# EAGLE board Qwiic Distance Sensor - VCNL4040-Panel (EAGLE 7.7.0)
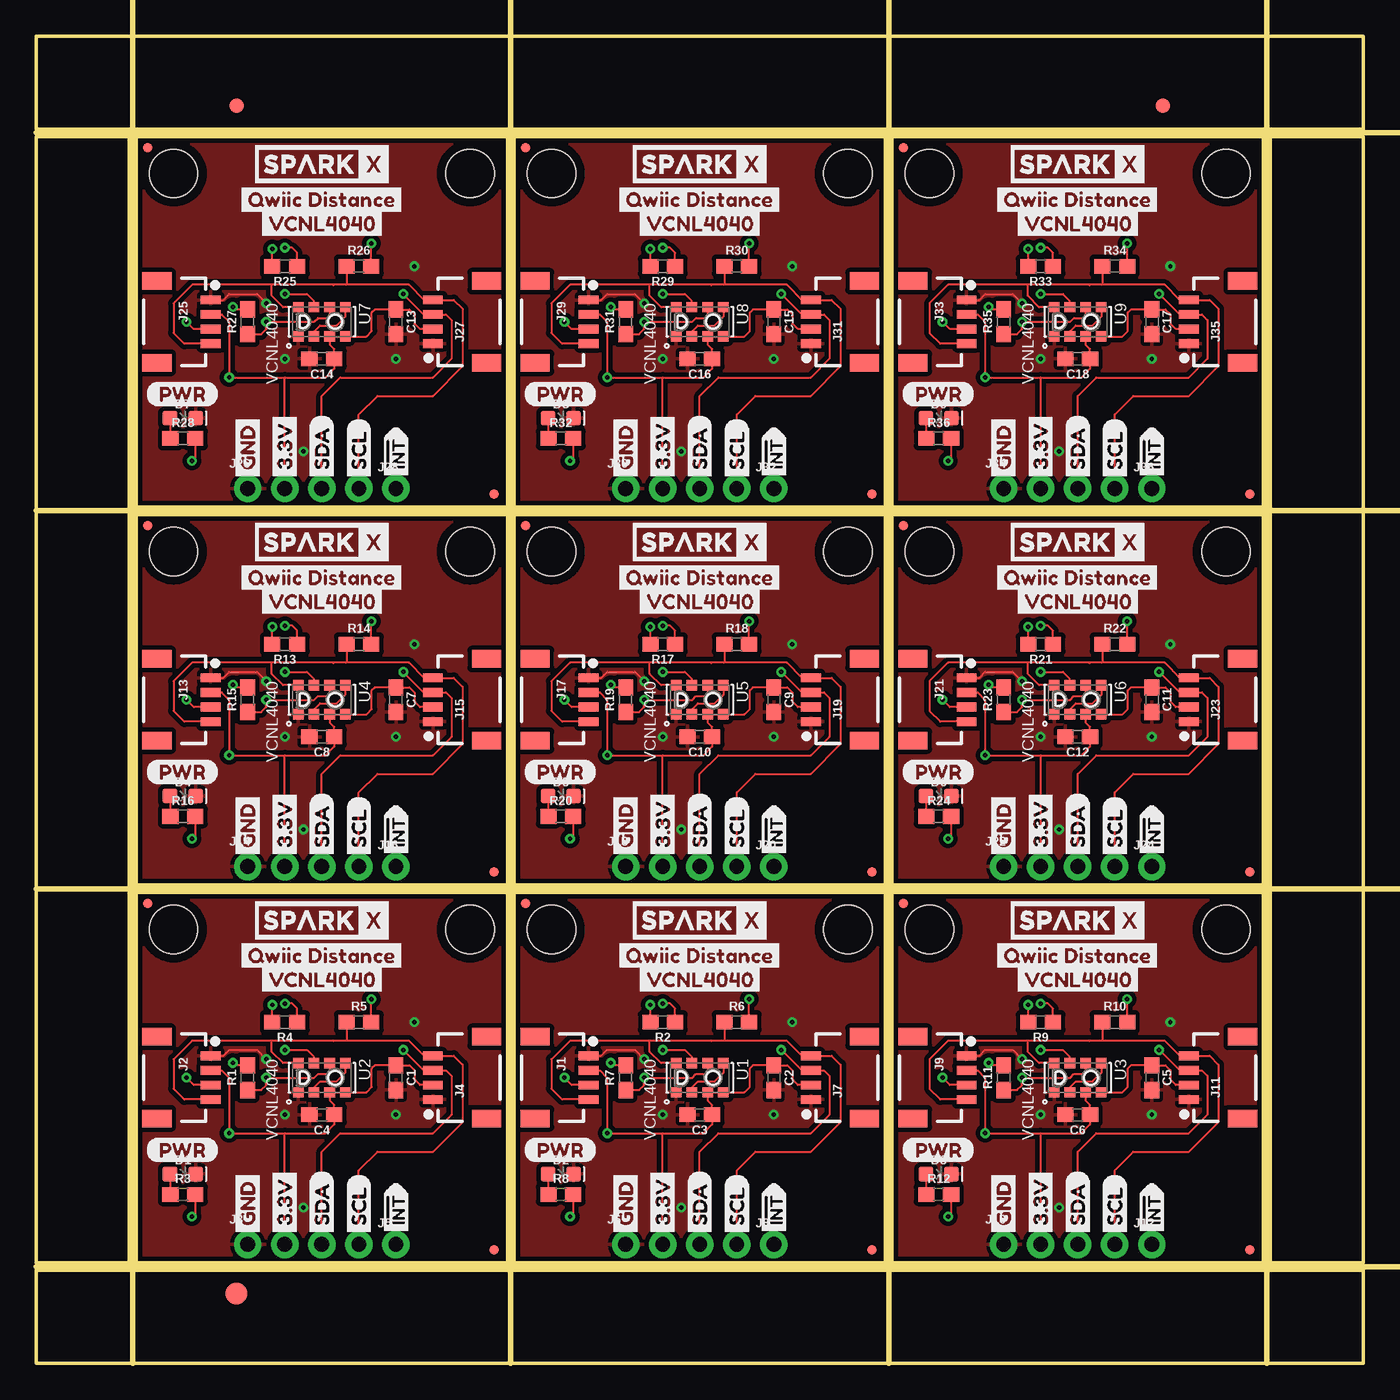
[diagram p0: board, top side]
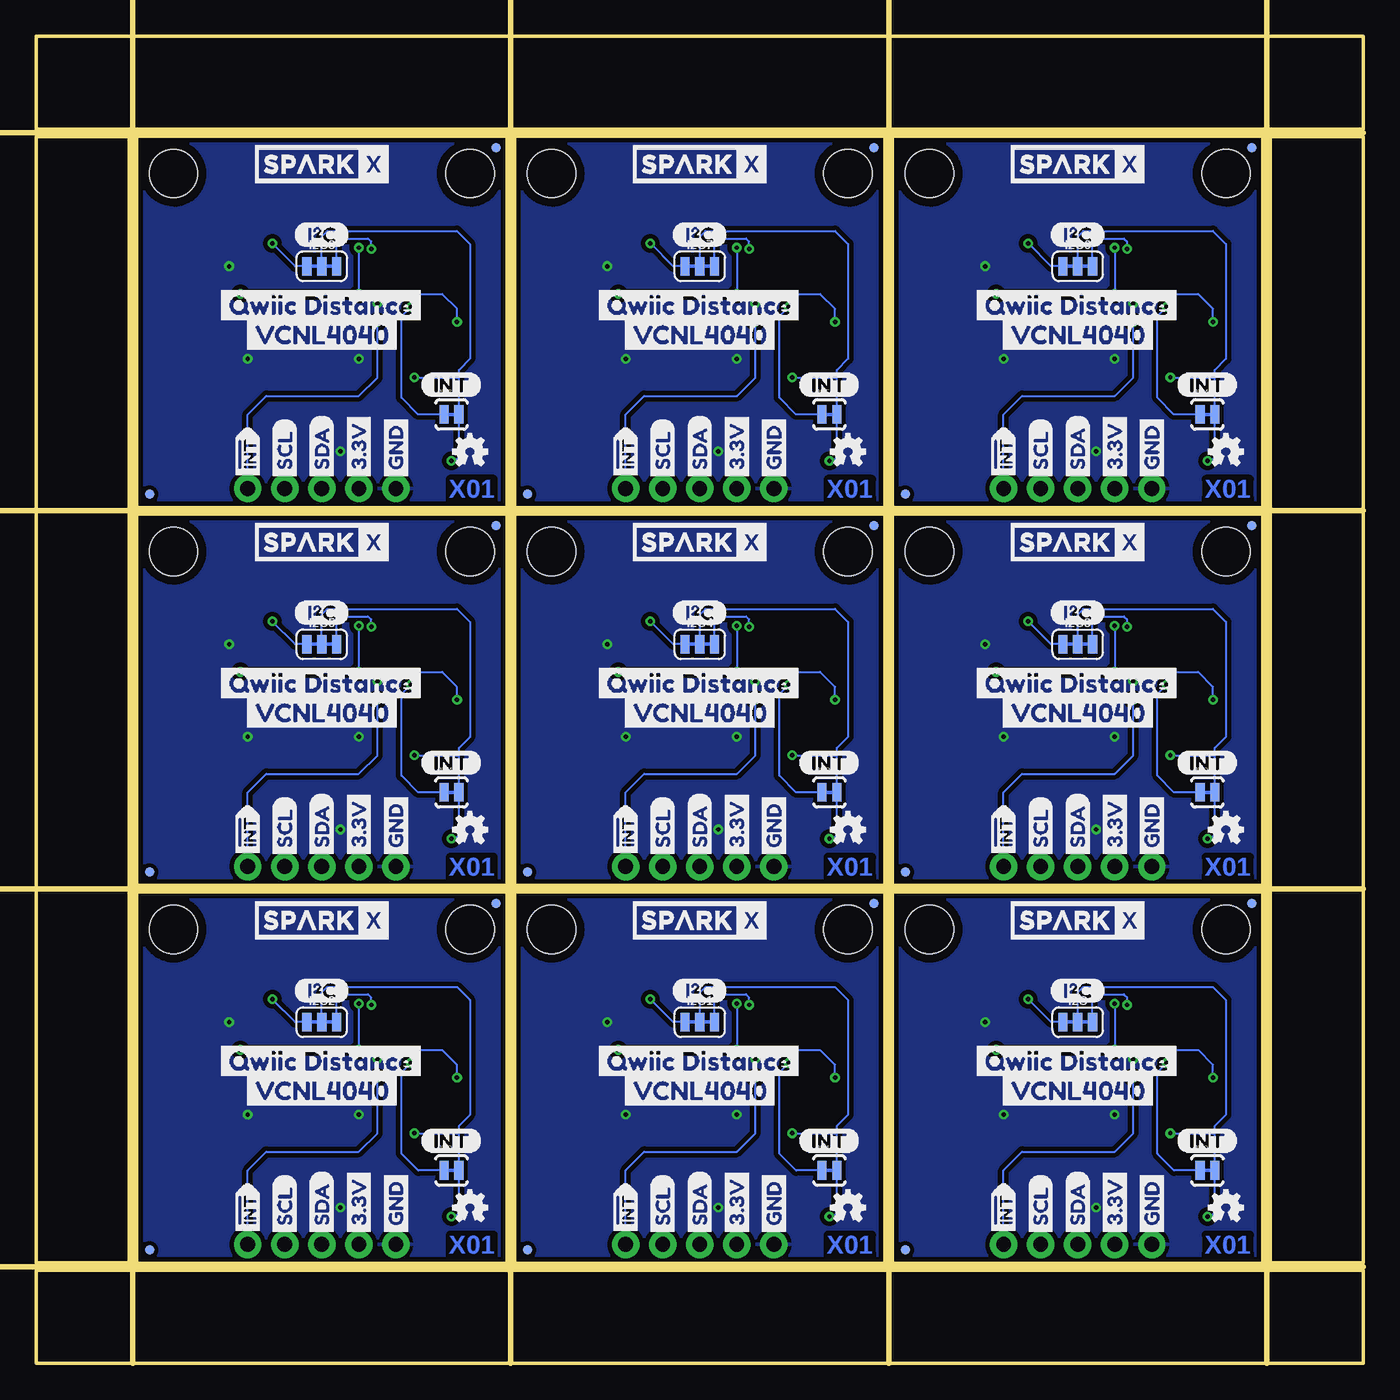
[diagram p1: board, bottom side, seen from below]

Size 90.93 x 90.93 mm. Coordinates in mm from the lower left corner, seen from the top.
Outline: 6.86,6.86 6.86,32.26 32.26,32.26 32.26,6.86 6.86,6.86
Outline: 32.77,6.86 32.77,32.26 58.17,32.26 58.17,6.86 32.77,6.86
Outline: 58.67,6.86 58.67,32.26 84.07,32.26 84.07,6.86 58.67,6.86
Outline: 6.86,32.77 6.86,58.17 32.26,58.17 32.26,32.77 6.86,32.77
Outline: 32.77,32.77 32.77,58.17 58.17,58.17 58.17,32.77 32.77,32.77
Outline: 58.67,32.77 58.67,58.17 84.07,58.17 84.07,32.77 58.67,32.77
Outline: 6.86,58.67 6.86,84.07 32.26,84.07 32.26,58.67 6.86,58.67
Outline: 32.77,58.67 32.77,84.07 58.17,84.07 58.17,58.67 32.77,58.67
Outline: 58.67,58.67 58.67,84.07 84.07,84.07 84.07,58.67 58.67,58.67
Outline: 0,6.35 90.93,6.35 90.93,0 0,0 0,6.35
Outline: 84.58,84.07 90.93,84.07 90.93,6.86 84.58,6.86 84.58,84.07
Outline: 0,90.93 90.93,90.93 90.93,84.58 0,84.58 0,90.93
Outline: 0,84.07 6.35,84.07 6.35,6.86 0,6.86 0,84.07
Copper layers (1*16): Top 0.035mm / dielectric 1.5mm / Bottom 0.035mm
Design rules "SparkFun-2-layer-PCBWay-LIMIT": minimum track width 6mil, minimum drill 0.3mm, track to track 6mil, track to pad 6mil, pad to pad 6mil, via to via 6mil, smd to smd 6mil, copper to edge 6mil, drill to drill 6mil, minimum pad ring 7mil, minimum via ring 7mil, stop-mask expansion 4mil, vias tented up to drill 25mil, thermal gap 10mil
Milling: 8 lines

## Footprints (pad centres in the part's own frame; a part is rotated, then mirrored left to right if it is on the bottom)
0603 = smd 1.1 x 1: 1 -0.85,0; 2 0.85,0
LED-0603 = smd 1 x 1: A -0.877,0; C 0.877,0
FIDUCIAL-1X2 = smd 1 x 1: 1 0,0
FIDUCIAL-1.5X3 = smd 1.5 x 1.5: 1 0,0
SMT-JUMPER_3_2-NC_TRACE_SILK = smd 0.635 x 1.27: 1 -1.016,0; 2 0,0; 3 1.016,0
1X04_1MM_RA = smd 0.6 x 1.35: 1 -1.5,0; 2 -0.5,0; 3 0.5,0; 4 1.5,0 | smd 1.2 x 2: NC1 2.8,-3.675; NC2 -2.8,-3.675
1X04_NO_SILK = drill 1.016 pad 1.88: 1 0,0; 2 2.54,0; 3 5.08,0; 4 7.62,0
1X01_NO_SILK = drill 1.016 pad 1.88: 1 0,0
MICRO-FIDUCIAL = smd 0.635 x 0.635: 1 0,0
STAND-OFF = hole 3.302: 0,0
PAD-JUMPER-2-NC_BY_TRACE_YES_SILK = smd 0.635 x 1.27: 1 -0.508,0; 2 0.508,0
VCNL4040 = smd 0.7 x 0.725: 1 1,-1.613; 2 1,-0.537; 3 1,0.537; 4 1,1.613; 5 -1,1.613; 6 -1,0.537; 7 -1,-0.537; 8 -1,-1.613

## Placement (x,y rotation side)
C1  2.2uF  [0603]  24.64,19.56 270 top
C2  2.2uF  [0603]  50.55,19.56 270 top
C3  0.1uF  [0603]  45.47,17.02 180 top
C4  0.1uF  [0603]  19.56,17.02 180 top
C5  2.2uF  [0603]  76.45,19.56 270 top
C6  0.1uF  [0603]  71.37,17.02 180 top
C7  2.2uF  [0603]  24.64,45.47 270 top
C8  0.1uF  [0603]  19.56,42.93 180 top
C9  2.2uF  [0603]  50.55,45.47 270 top
C10  0.1uF  [0603]  45.47,42.93 180 top
C11  2.2uF  [0603]  76.45,45.47 270 top
C12  0.1uF  [0603]  71.37,42.93 180 top
C13  2.2uF  [0603]  24.64,71.37 270 top
C14  0.1uF  [0603]  19.56,68.83 180 top
C15  2.2uF  [0603]  50.55,71.37 270 top
C16  0.1uF  [0603]  45.47,68.83 180 top
C17  2.2uF  [0603]  76.45,71.37 270 top
C18  0.1uF  [0603]  71.37,68.83 180 top
D1  RED  [LED-0603]  10.03,12.95 0 top
D2  RED  [LED-0603]  35.94,12.95 0 top
D3  RED  [LED-0603]  61.85,12.95 0 top
D4  RED  [LED-0603]  10.03,38.86 0 top
D5  RED  [LED-0603]  35.94,38.86 0 top
D6  RED  [LED-0603]  61.85,38.86 0 top
D7  RED  [LED-0603]  10.03,64.77 0 top
D8  RED  [LED-0603]  35.94,64.77 0 top
D9  RED  [LED-0603]  61.85,64.77 0 top
E$1  [FIDUCIAL-1X2]  13.72,86.17 0 top
E$2  [FIDUCIAL-1X2]  77.22,86.17 0 top
E$3  [FIDUCIAL-1.5X3]  13.72,4.76 0 top
I2C  [SMT-JUMPER_3_2-NC_TRACE_SILK]  19.56,23.37 0 bottom
I2C1  [SMT-JUMPER_3_2-NC_TRACE_SILK]  45.47,23.37 0 bottom
I2C2  [SMT-JUMPER_3_2-NC_TRACE_SILK]  71.37,23.37 0 bottom
I2C3  [SMT-JUMPER_3_2-NC_TRACE_SILK]  19.56,49.28 0 bottom
I2C4  [SMT-JUMPER_3_2-NC_TRACE_SILK]  45.47,49.28 0 bottom
I2C5  [SMT-JUMPER_3_2-NC_TRACE_SILK]  71.37,49.28 0 bottom
I2C6  [SMT-JUMPER_3_2-NC_TRACE_SILK]  19.56,75.18 0 bottom
I2C7  [SMT-JUMPER_3_2-NC_TRACE_SILK]  45.47,75.18 0 bottom
I2C8  [SMT-JUMPER_3_2-NC_TRACE_SILK]  71.37,75.18 0 bottom
J1  SMD  [1X04_1MM_RA]  37.85,19.56 270 top
J2  SMD  [1X04_1MM_RA]  11.94,19.56 270 top
J3  PTH  [1X04_NO_SILK]  14.48,8.13 0 top
J4  SMD  [1X04_1MM_RA]  27.18,19.56 90 top
J5  [1X01_NO_SILK]  24.64,8.13 0 top
J6  PTH  [1X04_NO_SILK]  40.39,8.13 0 top
J7  SMD  [1X04_1MM_RA]  53.09,19.56 90 top
J8  [1X01_NO_SILK]  50.55,8.13 0 top
J9  SMD  [1X04_1MM_RA]  63.75,19.56 270 top
J10  PTH  [1X04_NO_SILK]  66.29,8.13 0 top
J11  SMD  [1X04_1MM_RA]  78.99,19.56 90 top
J12  [1X01_NO_SILK]  76.45,8.13 0 top
J13  SMD  [1X04_1MM_RA]  11.94,45.47 270 top
J14  PTH  [1X04_NO_SILK]  14.48,34.04 0 top
J15  SMD  [1X04_1MM_RA]  27.18,45.47 90 top
J16  [1X01_NO_SILK]  24.64,34.04 0 top
J17  SMD  [1X04_1MM_RA]  37.85,45.47 270 top
J18  PTH  [1X04_NO_SILK]  40.39,34.04 0 top
J19  SMD  [1X04_1MM_RA]  53.09,45.47 90 top
J20  [1X01_NO_SILK]  50.55,34.04 0 top
J21  SMD  [1X04_1MM_RA]  63.75,45.47 270 top
J22  PTH  [1X04_NO_SILK]  66.29,34.04 0 top
J23  SMD  [1X04_1MM_RA]  78.99,45.47 90 top
J24  [1X01_NO_SILK]  76.45,34.04 0 top
J25  SMD  [1X04_1MM_RA]  11.94,71.37 270 top
J26  PTH  [1X04_NO_SILK]  14.48,59.94 0 top
J27  SMD  [1X04_1MM_RA]  27.18,71.37 90 top
J28  [1X01_NO_SILK]  24.64,59.94 0 top
J29  SMD  [1X04_1MM_RA]  37.85,71.37 270 top
J30  PTH  [1X04_NO_SILK]  40.39,59.94 0 top
J31  SMD  [1X04_1MM_RA]  53.09,71.37 90 top
J32  [1X01_NO_SILK]  50.55,59.94 0 top
J33  SMD  [1X04_1MM_RA]  63.75,71.37 270 top
J34  PTH  [1X04_NO_SILK]  66.29,59.94 0 top
J35  SMD  [1X04_1MM_RA]  78.99,71.37 90 top
J36  [1X01_NO_SILK]  76.45,59.94 0 top
JP1  FIDUCIALUFIDUCIAL  [MICRO-FIDUCIAL]  7.62,31.5 0 bottom
JP2  FIDUCIALUFIDUCIAL  [MICRO-FIDUCIAL]  31.37,7.75 0 top
JP3  STAND-OFF  [STAND-OFF]  9.4,29.72 0 top
JP4  STAND-OFF  [STAND-OFF]  29.72,29.72 0 top
JP5  FIDUCIALUFIDUCIAL  [MICRO-FIDUCIAL]  31.37,7.75 0 bottom
JP6  FIDUCIALUFIDUCIAL  [MICRO-FIDUCIAL]  7.62,31.5 0 top
JP7  STAND-OFF  [STAND-OFF]  35.31,29.72 0 top
JP8  STAND-OFF  [STAND-OFF]  55.63,29.72 0 top
JP9  INT  [PAD-JUMPER-2-NC_BY_TRACE_YES_SILK]  10.67,13.21 0 bottom
JP10  FIDUCIALUFIDUCIAL  [MICRO-FIDUCIAL]  57.28,7.75 0 top
JP11  FIDUCIALUFIDUCIAL  [MICRO-FIDUCIAL]  33.53,31.5 0 top
JP12  FIDUCIALUFIDUCIAL  [MICRO-FIDUCIAL]  33.53,31.5 0 bottom
JP13  FIDUCIALUFIDUCIAL  [MICRO-FIDUCIAL]  57.28,7.75 0 bottom
JP14  INT  [PAD-JUMPER-2-NC_BY_TRACE_YES_SILK]  36.58,13.21 0 bottom
JP15  STAND-OFF  [STAND-OFF]  61.21,29.72 0 top
JP16  STAND-OFF  [STAND-OFF]  81.53,29.72 0 top
JP17  FIDUCIALUFIDUCIAL  [MICRO-FIDUCIAL]  83.19,7.75 0 top
JP18  FIDUCIALUFIDUCIAL  [MICRO-FIDUCIAL]  59.44,31.5 0 top
JP19  FIDUCIALUFIDUCIAL  [MICRO-FIDUCIAL]  59.44,31.5 0 bottom
JP20  FIDUCIALUFIDUCIAL  [MICRO-FIDUCIAL]  83.19,7.75 0 bottom
JP21  INT  [PAD-JUMPER-2-NC_BY_TRACE_YES_SILK]  62.48,13.21 0 bottom
JP22  STAND-OFF  [STAND-OFF]  9.4,55.63 0 top
JP23  STAND-OFF  [STAND-OFF]  29.72,55.63 0 top
JP24  FIDUCIALUFIDUCIAL  [MICRO-FIDUCIAL]  31.37,33.66 0 top
JP25  FIDUCIALUFIDUCIAL  [MICRO-FIDUCIAL]  7.62,57.4 0 top
JP26  FIDUCIALUFIDUCIAL  [MICRO-FIDUCIAL]  7.62,57.4 0 bottom
JP27  FIDUCIALUFIDUCIAL  [MICRO-FIDUCIAL]  31.37,33.66 0 bottom
JP28  INT  [PAD-JUMPER-2-NC_BY_TRACE_YES_SILK]  10.67,39.12 0 bottom
JP29  STAND-OFF  [STAND-OFF]  35.31,55.63 0 top
JP30  STAND-OFF  [STAND-OFF]  55.63,55.63 0 top
JP31  FIDUCIALUFIDUCIAL  [MICRO-FIDUCIAL]  57.28,33.66 0 top
JP32  FIDUCIALUFIDUCIAL  [MICRO-FIDUCIAL]  33.53,57.4 0 top
JP33  FIDUCIALUFIDUCIAL  [MICRO-FIDUCIAL]  33.53,57.4 0 bottom
JP34  FIDUCIALUFIDUCIAL  [MICRO-FIDUCIAL]  57.28,33.66 0 bottom
JP35  INT  [PAD-JUMPER-2-NC_BY_TRACE_YES_SILK]  36.58,39.12 0 bottom
JP36  STAND-OFF  [STAND-OFF]  61.21,55.63 0 top
JP37  STAND-OFF  [STAND-OFF]  81.53,55.63 0 top
JP38  FIDUCIALUFIDUCIAL  [MICRO-FIDUCIAL]  83.19,33.66 0 top
JP39  FIDUCIALUFIDUCIAL  [MICRO-FIDUCIAL]  59.44,57.4 0 top
JP40  FIDUCIALUFIDUCIAL  [MICRO-FIDUCIAL]  59.44,57.4 0 bottom
JP41  FIDUCIALUFIDUCIAL  [MICRO-FIDUCIAL]  83.19,33.66 0 bottom
JP42  INT  [PAD-JUMPER-2-NC_BY_TRACE_YES_SILK]  62.48,39.12 0 bottom
JP43  STAND-OFF  [STAND-OFF]  9.4,81.53 0 top
JP44  STAND-OFF  [STAND-OFF]  29.72,81.53 0 top
JP45  FIDUCIALUFIDUCIAL  [MICRO-FIDUCIAL]  31.37,59.56 0 top
JP46  FIDUCIALUFIDUCIAL  [MICRO-FIDUCIAL]  7.62,83.31 0 top
JP47  FIDUCIALUFIDUCIAL  [MICRO-FIDUCIAL]  7.62,83.31 0 bottom
JP48  FIDUCIALUFIDUCIAL  [MICRO-FIDUCIAL]  31.37,59.56 0 bottom
JP49  INT  [PAD-JUMPER-2-NC_BY_TRACE_YES_SILK]  10.67,65.02 0 bottom
JP50  STAND-OFF  [STAND-OFF]  35.31,81.53 0 top
JP51  STAND-OFF  [STAND-OFF]  55.63,81.53 0 top
JP52  FIDUCIALUFIDUCIAL  [MICRO-FIDUCIAL]  57.28,59.56 0 top
JP53  FIDUCIALUFIDUCIAL  [MICRO-FIDUCIAL]  33.53,83.31 0 top
JP54  FIDUCIALUFIDUCIAL  [MICRO-FIDUCIAL]  33.53,83.31 0 bottom
JP55  FIDUCIALUFIDUCIAL  [MICRO-FIDUCIAL]  57.28,59.56 0 bottom
JP56  INT  [PAD-JUMPER-2-NC_BY_TRACE_YES_SILK]  36.58,65.02 0 bottom
JP57  STAND-OFF  [STAND-OFF]  61.21,81.53 0 top
JP58  STAND-OFF  [STAND-OFF]  81.53,81.53 0 top
JP59  FIDUCIALUFIDUCIAL  [MICRO-FIDUCIAL]  83.19,59.56 0 top
JP60  FIDUCIALUFIDUCIAL  [MICRO-FIDUCIAL]  59.44,83.31 0 top
JP61  FIDUCIALUFIDUCIAL  [MICRO-FIDUCIAL]  59.44,83.31 0 bottom
JP62  FIDUCIALUFIDUCIAL  [MICRO-FIDUCIAL]  83.19,59.56 0 bottom
JP63  INT  [PAD-JUMPER-2-NC_BY_TRACE_YES_SILK]  62.48,65.02 0 bottom
LOGO1  OSHW-LOGOMINI  [OSHW-LOGO-MINI]  9.4,10.67 0 bottom
LOGO2  OSHW-LOGOMINI  [OSHW-LOGO-MINI]  35.31,10.67 0 bottom
LOGO3  OSHW-LOGOMINI  [OSHW-LOGO-MINI]  61.21,10.67 0 bottom
LOGO4  OSHW-LOGOMINI  [OSHW-LOGO-MINI]  9.4,36.58 0 bottom
LOGO5  OSHW-LOGOMINI  [OSHW-LOGO-MINI]  35.31,36.58 0 bottom
LOGO6  OSHW-LOGOMINI  [OSHW-LOGO-MINI]  61.21,36.58 0 bottom
LOGO7  OSHW-LOGOMINI  [OSHW-LOGO-MINI]  9.4,62.48 0 bottom
LOGO8  OSHW-LOGOMINI  [OSHW-LOGO-MINI]  35.31,62.48 0 bottom
LOGO9  OSHW-LOGOMINI  [OSHW-LOGO-MINI]  61.21,62.48 0 bottom
R1  10k  [0603]  14.48,19.56 90 top
R2  2.2k  [0603]  42.93,23.37 180 top
R3  1k  [0603]  10.03,11.56 0 top
R4  2.2k  [0603]  17.02,23.37 180 top
R5  2.2k  [0603]  22.1,23.37 0 top
R6  2.2k  [0603]  48.01,23.37 0 top
R7  10k  [0603]  40.39,19.56 90 top
R8  1k  [0603]  35.94,11.56 0 top
R9  2.2k  [0603]  68.83,23.37 180 top
R10  2.2k  [0603]  73.91,23.37 0 top
R11  10k  [0603]  66.29,19.56 90 top
R12  1k  [0603]  61.85,11.56 0 top
R13  2.2k  [0603]  17.02,49.28 180 top
R14  2.2k  [0603]  22.1,49.28 0 top
R15  10k  [0603]  14.48,45.47 90 top
R16  1k  [0603]  10.03,37.46 0 top
R17  2.2k  [0603]  42.93,49.28 180 top
R18  2.2k  [0603]  48.01,49.28 0 top
R19  10k  [0603]  40.39,45.47 90 top
R20  1k  [0603]  35.94,37.46 0 top
R21  2.2k  [0603]  68.83,49.28 180 top
R22  2.2k  [0603]  73.91,49.28 0 top
R23  10k  [0603]  66.29,45.47 90 top
R24  1k  [0603]  61.85,37.46 0 top
R25  2.2k  [0603]  17.02,75.18 180 top
R26  2.2k  [0603]  22.1,75.18 0 top
R27  10k  [0603]  14.48,71.37 90 top
R28  1k  [0603]  10.03,63.37 0 top
R29  2.2k  [0603]  42.93,75.18 180 top
R30  2.2k  [0603]  48.01,75.18 0 top
R31  10k  [0603]  40.39,71.37 90 top
R32  1k  [0603]  35.94,63.37 0 top
R33  2.2k  [0603]  68.83,75.18 180 top
R34  2.2k  [0603]  73.91,75.18 0 top
R35  10k  [0603]  66.29,71.37 90 top
R36  1k  [0603]  61.85,63.37 0 top
U1  VCNL4040  [VCNL4040]  45.47,19.56 270 top
U2  VCNL4040  [VCNL4040]  19.56,19.56 270 top
U3  VCNL4040  [VCNL4040]  71.37,19.56 270 top
U4  VCNL4040  [VCNL4040]  19.56,45.47 270 top
U5  VCNL4040  [VCNL4040]  45.47,45.47 270 top
U6  VCNL4040  [VCNL4040]  71.37,45.47 270 top
U7  VCNL4040  [VCNL4040]  19.56,71.37 270 top
U8  VCNL4040  [VCNL4040]  45.47,71.37 270 top
U9  VCNL4040  [VCNL4040]  71.37,71.37 270 top
U$1  SPARKX-LOGO4  [SPARKX-MEDIUM]  19.56,30.35 0 top
U$2  SPARKX-LOGO4  [SPARKX-MEDIUM]  19.56,30.35 0 bottom
U$3  [GND1]  14.48,8.51 90 bottom
U$4  [3#3V2]  17.02,8.51 90 bottom
U$5  [SDA8]  19.56,8.51 90 bottom
U$6  [SCL9]  22.1,8.51 90 bottom
U$7  [#INT14]  24.64,8.38 90 bottom
U$8  SPARKX-LOGO4  [SPARKX-MEDIUM]  45.47,30.35 0 bottom
U$9  SPARKX-LOGO4  [SPARKX-MEDIUM]  45.47,30.35 0 top
U$10  [(PWR)]  7.49,14.61 0 top
U$11  [(I_SUPER2_C)]  21.46,25.53 0 bottom
U$12  [(INT)]  12.83,15.24 0 bottom
U$13  [VCNL40400]  14.99,26.29 0 top
U$14  [VCNL40401]  25.27,18.67 0 bottom
U$15  [QWIIC_DISTANCE7]  27.05,20.7 0 bottom
U$16  [QWIIC_DISTANCE7]  52.96,20.7 0 bottom
U$17  [QWIIC_DISTANCE9]  39.5,27.94 0 top
U$18  [3#3V2]  42.93,8.51 90 top
U$19  [QWIIC_DISTANCE9]  13.59,27.94 0 top
U$20  [GND1]  40.39,8.51 90 top
U$21  [3#3V2]  17.02,8.51 90 top
U$22  [GND1]  14.48,8.51 90 top
U$23  [#INT14]  50.55,8.38 90 top
U$24  [SCL9]  48.01,8.51 90 top
U$25  [#INT14]  24.64,8.38 90 top
U$26  [SCL9]  22.1,8.51 90 top
U$27  [SDA8]  19.56,8.51 90 top
U$28  [SDA8]  45.47,8.51 90 top
U$29  [GND1]  40.39,8.51 90 bottom
U$30  [3#3V2]  42.93,8.51 90 bottom
U$31  [SDA8]  45.47,8.51 90 bottom
U$32  [SCL9]  48.01,8.51 90 bottom
U$33  [#INT14]  50.55,8.38 90 bottom
U$34  [(PWR)]  33.4,14.61 0 top
U$35  [(I_SUPER2_C)]  47.37,25.53 0 bottom
U$36  [(INT)]  38.73,15.24 0 bottom
U$37  [VCNL40400]  40.89,26.29 0 top
U$38  [VCNL40401]  51.18,18.67 0 bottom
U$39  SPARKX-LOGO4  [SPARKX-MEDIUM]  71.37,30.35 0 bottom
U$40  SPARKX-LOGO4  [SPARKX-MEDIUM]  71.37,30.35 0 top
U$41  [QWIIC_DISTANCE7]  78.87,20.7 0 bottom
U$42  [QWIIC_DISTANCE9]  65.41,27.94 0 top
U$43  [3#3V2]  68.83,8.51 90 top
U$44  [GND1]  66.29,8.51 90 top
U$45  [#INT14]  76.45,8.38 90 top
U$46  [SCL9]  73.91,8.51 90 top
U$47  [SDA8]  71.37,8.51 90 top
U$48  [GND1]  66.29,8.51 90 bottom
U$49  [3#3V2]  68.83,8.51 90 bottom
U$50  [SDA8]  71.37,8.51 90 bottom
U$51  [SCL9]  73.91,8.51 90 bottom
U$52  [#INT14]  76.45,8.38 90 bottom
U$53  [(PWR)]  59.31,14.61 0 top
U$54  [(I_SUPER2_C)]  73.28,25.53 0 bottom
U$55  [(INT)]  64.64,15.24 0 bottom
U$56  [VCNL40400]  66.8,26.29 0 top
U$57  [VCNL40401]  77.09,18.67 0 bottom
U$58  SPARKX-LOGO4  [SPARKX-MEDIUM]  19.56,56.26 0 bottom
U$59  SPARKX-LOGO4  [SPARKX-MEDIUM]  19.56,56.26 0 top
U$60  [QWIIC_DISTANCE7]  27.05,46.61 0 bottom
U$61  [QWIIC_DISTANCE9]  13.59,53.85 0 top
U$62  [3#3V2]  17.02,34.42 90 top
U$63  [GND1]  14.48,34.42 90 top
U$64  [#INT14]  24.64,34.29 90 top
U$65  [SCL9]  22.1,34.42 90 top
U$66  [SDA8]  19.56,34.42 90 top
U$67  [GND1]  14.48,34.42 90 bottom
U$68  [3#3V2]  17.02,34.42 90 bottom
U$69  [SDA8]  19.56,34.42 90 bottom
U$70  [SCL9]  22.1,34.42 90 bottom
U$71  [#INT14]  24.64,34.29 90 bottom
U$72  [(PWR)]  7.49,40.51 0 top
U$73  [(I_SUPER2_C)]  21.46,51.43 0 bottom
U$74  [(INT)]  12.83,41.15 0 bottom
U$75  [VCNL40400]  14.99,52.2 0 top
U$76  [VCNL40401]  25.27,44.58 0 bottom
U$77  SPARKX-LOGO4  [SPARKX-MEDIUM]  45.47,56.26 0 bottom
U$78  SPARKX-LOGO4  [SPARKX-MEDIUM]  45.47,56.26 0 top
U$79  [QWIIC_DISTANCE7]  52.96,46.61 0 bottom
U$80  [QWIIC_DISTANCE9]  39.5,53.85 0 top
U$81  [3#3V2]  42.93,34.42 90 top
U$82  [GND1]  40.39,34.42 90 top
U$83  [#INT14]  50.55,34.29 90 top
U$84  [SCL9]  48.01,34.42 90 top
U$85  [SDA8]  45.47,34.42 90 top
U$86  [GND1]  40.39,34.42 90 bottom
U$87  [3#3V2]  42.93,34.42 90 bottom
U$88  [SDA8]  45.47,34.42 90 bottom
U$89  [SCL9]  48.01,34.42 90 bottom
U$90  [#INT14]  50.55,34.29 90 bottom
U$91  [(PWR)]  33.4,40.51 0 top
U$92  [(I_SUPER2_C)]  47.37,51.43 0 bottom
U$93  [(INT)]  38.73,41.15 0 bottom
U$94  [VCNL40400]  40.89,52.2 0 top
U$95  [VCNL40401]  51.18,44.58 0 bottom
U$96  SPARKX-LOGO4  [SPARKX-MEDIUM]  71.37,56.26 0 bottom
U$97  SPARKX-LOGO4  [SPARKX-MEDIUM]  71.37,56.26 0 top
U$98  [QWIIC_DISTANCE7]  78.87,46.61 0 bottom
U$99  [QWIIC_DISTANCE9]  65.41,53.85 0 top
U$100  [3#3V2]  68.83,34.42 90 top
U$101  [GND1]  66.29,34.42 90 top
U$102  [#INT14]  76.45,34.29 90 top
U$103  [SCL9]  73.91,34.42 90 top
U$104  [SDA8]  71.37,34.42 90 top
U$105  [GND1]  66.29,34.42 90 bottom
U$106  [3#3V2]  68.83,34.42 90 bottom
U$107  [SDA8]  71.37,34.42 90 bottom
U$108  [SCL9]  73.91,34.42 90 bottom
U$109  [#INT14]  76.45,34.29 90 bottom
U$110  [(PWR)]  59.31,40.51 0 top
U$111  [(I_SUPER2_C)]  73.28,51.43 0 bottom
U$112  [(INT)]  64.64,41.15 0 bottom
U$113  [VCNL40400]  66.8,52.2 0 top
U$114  [VCNL40401]  77.09,44.58 0 bottom
U$115  SPARKX-LOGO4  [SPARKX-MEDIUM]  19.56,82.17 0 bottom
U$116  SPARKX-LOGO4  [SPARKX-MEDIUM]  19.56,82.17 0 top
U$117  [QWIIC_DISTANCE7]  27.05,72.52 0 bottom
U$118  [QWIIC_DISTANCE9]  13.59,79.76 0 top
U$119  [3#3V2]  17.02,60.32 90 top
U$120  [GND1]  14.48,60.32 90 top
U$121  [#INT14]  24.64,60.2 90 top
U$122  [SCL9]  22.1,60.32 90 top
U$123  [SDA8]  19.56,60.32 90 top
U$124  [GND1]  14.48,60.32 90 bottom
U$125  [3#3V2]  17.02,60.32 90 bottom
U$126  [SDA8]  19.56,60.32 90 bottom
U$127  [SCL9]  22.1,60.32 90 bottom
U$128  [#INT14]  24.64,60.2 90 bottom
U$129  [(PWR)]  7.49,66.42 0 top
U$130  [(I_SUPER2_C)]  21.46,77.34 0 bottom
U$131  [(INT)]  12.83,67.06 0 bottom
U$132  [VCNL40400]  14.99,78.11 0 top
U$133  [VCNL40401]  25.27,70.48 0 bottom
U$134  SPARKX-LOGO4  [SPARKX-MEDIUM]  45.47,82.17 0 bottom
U$135  SPARKX-LOGO4  [SPARKX-MEDIUM]  45.47,82.17 0 top
U$136  [QWIIC_DISTANCE7]  52.96,72.52 0 bottom
U$137  [QWIIC_DISTANCE9]  39.5,79.76 0 top
U$138  [3#3V2]  42.93,60.32 90 top
U$139  [GND1]  40.39,60.32 90 top
U$140  [#INT14]  50.55,60.2 90 top
U$141  [SCL9]  48.01,60.32 90 top
U$142  [SDA8]  45.47,60.32 90 top
U$143  [GND1]  40.39,60.32 90 bottom
U$144  [3#3V2]  42.93,60.32 90 bottom
U$145  [SDA8]  45.47,60.32 90 bottom
U$146  [SCL9]  48.01,60.32 90 bottom
U$147  [#INT14]  50.55,60.2 90 bottom
U$148  [(PWR)]  33.4,66.42 0 top
U$149  [(I_SUPER2_C)]  47.37,77.34 0 bottom
U$150  [(INT)]  38.73,67.06 0 bottom
U$151  [VCNL40400]  40.89,78.11 0 top
U$152  [VCNL40401]  51.18,70.48 0 bottom
U$153  SPARKX-LOGO4  [SPARKX-MEDIUM]  71.37,82.17 0 bottom
U$154  SPARKX-LOGO4  [SPARKX-MEDIUM]  71.37,82.17 0 top
U$155  [QWIIC_DISTANCE7]  78.87,72.52 0 bottom
U$156  [QWIIC_DISTANCE9]  65.41,79.76 0 top
U$157  [3#3V2]  68.83,60.32 90 top
U$158  [GND1]  66.29,60.32 90 top
U$159  [#INT14]  76.45,60.2 90 top
U$160  [SCL9]  73.91,60.32 90 top
U$161  [SDA8]  71.37,60.32 90 top
U$162  [GND1]  66.29,60.32 90 bottom
U$163  [3#3V2]  68.83,60.32 90 bottom
U$164  [SDA8]  71.37,60.32 90 bottom
U$165  [SCL9]  73.91,60.32 90 bottom
U$166  [#INT14]  76.45,60.2 90 bottom
U$167  [(PWR)]  59.31,66.42 0 top
U$168  [(I_SUPER2_C)]  73.28,77.34 0 bottom
U$169  [(INT)]  64.64,67.06 0 bottom
U$170  [VCNL40400]  66.8,78.11 0 top
U$171  [VCNL40401]  77.09,70.48 0 bottom

## Library data of the parts
C1 C2 C5 C7 C9 C11 C13 C15 C17 = SparkFun-Capacitors; PROD_ID: CAP-07888
C3 C4 C6 C8 C10 C12 C14 C16 C18 = SparkFun-Capacitors; PROD_ID: CAP-00810
D1-D9 = SparkFun-LED; PROD_ID: DIO-00819
E$1 E$2 LOGO1-LOGO9 = SparkFun-Aesthetics
E$3 = SparkFun-Retired
I2C I2C1-I2C8 = SparkFun-Jumpers
J1-J4 J6 J7 J9-J11 J13-J15 J17-J19 J21-J23 J25-J27 J29-J31 J33-J35 U1-U9 U$1 U$2 U$8 U$9 U$39 U$40 U$58 U$59 U$77 U$78 U$96 U$97 U$115 U$116 U$134 U$135 U$153 U$154 = SparkX
J5 J8 J12 J16 J20 J24 J28 J32 J36 = SparkFun-Connectors
JP1-JP8 JP10-JP13 JP15-JP20 JP22-JP27 JP29-JP34 JP36-JP41 JP43-JP48 JP50-JP55 JP57-JP62 = SparkFun
JP9 JP14 JP21 JP28 JP35 JP42 JP49 JP56 JP63 = SparkFun-Passives
R1 R7 R11 R15 R19 R23 R27 R31 R35 = SparkFun-Resistors; PROD_ID: RES-00824
R2 R4-R6 R9 R10 R13 R14 R17 R18 R21 R22 R25 R26 R29 R30 R33 R34 = SparkFun-Resistors; PROD_ID: RES-08272
R3 R8 R12 R16 R20 R24 R28 R32 R36 = SparkFun-Resistors; PROD_ID: RES-07856
U$3-U$7 U$10-U$12 U$18 U$20-U$36 U$43-U$55 U$62-U$74 U$81-U$93 U$100-U$112 U$119-U$131 U$138-U$150 U$157-U$169 = Labels-0_04
U$13 U$14 U$37 U$38 U$56 U$57 U$75 U$76 U$94 U$95 U$113 U$114 U$132 U$133 U$151 U$152 U$170 U$171 = buzzard_labels (3)
U$15 U$16 U$41 U$60 U$79 U$98 U$117 U$136 U$155 = buzzard_labels (14)
U$17 U$19 U$42 U$61 U$80 U$99 U$118 U$137 U$156 = buzzard_labels (15)

## Nets
3.3V: C1.1 C4.1 I2C.2 J2.2 J3.2 J4.2 JP9.2 R3.2 U2.3 U2.4
3.3V1: C2.1 C3.1 I2C1.2 J1.2 J6.2 J7.2 JP14.2 R8.2 U1.3 U1.4
3.3V2: C5.1 C6.1 I2C2.2 J9.2 J10.2 J11.2 JP21.2 R12.2 U3.3 U3.4
3.3V3: C7.1 C8.1 I2C3.2 J13.2 J14.2 J15.2 JP28.2 R16.2 U4.3 U4.4
3.3V4: C9.1 C10.1 I2C4.2 J17.2 J18.2 J19.2 JP35.2 R20.2 U5.3 U5.4
3.3V5: C11.1 C12.1 I2C5.2 J21.2 J22.2 J23.2 JP42.2 R24.2 U6.3 U6.4
3.3V6: C13.1 C14.1 I2C6.2 J25.2 J26.2 J27.2 JP49.2 R28.2 U7.3 U7.4
3.3V7: C15.1 C16.1 I2C7.2 J29.2 J30.2 J31.2 JP56.2 R32.2 U8.3 U8.4
3.3V8: C17.1 C18.1 I2C8.2 J33.2 J34.2 J35.2 JP63.2 R36.2 U9.3 U9.4
!INT: J5.1 R1.1 U2.6
!INT1: J8.1 R7.1 U1.6
!INT2: J12.1 R11.1 U3.6
!INT3: J16.1 R15.1 U4.6
!INT4: J20.1 R19.1 U5.6
!INT5: J24.1 R23.1 U6.6
!INT6: J28.1 R27.1 U7.6
!INT7: J32.1 R31.1 U8.6
!INT8: J36.1 R35.1 U9.6
GND: C1.2 C4.2 D1.C J2.1 J3.1 J4.1 U2.1
GND1: C2.2 C3.2 D2.C J1.1 J6.1 J7.1 U1.1
GND2: C5.2 C6.2 D3.C J9.1 J10.1 J11.1 U3.1
GND3: C7.2 C8.2 D4.C J13.1 J14.1 J15.1 U4.1
GND4: C9.2 C10.2 D5.C J17.1 J18.1 J19.1 U5.1
GND5: C11.2 C12.2 D6.C J21.1 J22.1 J23.1 U6.1
GND6: C13.2 C14.2 D7.C J25.1 J26.1 J27.1 U7.1
GND7: C15.2 C16.2 D8.C J29.1 J30.1 J31.1 U8.1
GND8: C17.2 C18.2 D9.C J33.1 J34.1 J35.1 U9.1
N$1: I2C.1 R5.2
N$2: I2C.3 R4.2
N$3: D1.A R3.1
N$4: JP9.1 R1.2
N$5: I2C1.1 R6.2
N$6: U2.2 U2.5
N$7: I2C1.3 R2.2
N$8: JP14.1 R7.2
N$9: D2.A R8.1
N$10: U1.2 U1.5
N$11: I2C2.1 R10.2
N$12: I2C2.3 R9.2
N$13: JP21.1 R11.2
N$14: D3.A R12.1
N$15: U3.2 U3.5
N$16: I2C3.1 R14.2
N$17: I2C3.3 R13.2
N$18: JP28.1 R15.2
N$19: D4.A R16.1
N$20: U4.2 U4.5
N$21: I2C4.1 R18.2
N$22: I2C4.3 R17.2
N$23: JP35.1 R19.2
N$24: D5.A R20.1
N$25: U5.2 U5.5
N$26: I2C5.1 R22.2
N$27: I2C5.3 R21.2
N$28: JP42.1 R23.2
N$29: D6.A R24.1
N$30: U6.2 U6.5
N$31: I2C6.1 R26.2
N$32: I2C6.3 R25.2
N$33: JP49.1 R27.2
N$34: D7.A R28.1
N$35: U7.2 U7.5
N$36: I2C7.1 R30.2
N$37: I2C7.3 R29.2
N$38: JP56.1 R31.2
N$39: D8.A R32.1
N$40: U8.2 U8.5
N$41: I2C8.1 R34.2
N$42: I2C8.3 R33.2
N$43: JP63.1 R35.2
N$44: D9.A R36.1
N$45: U9.2 U9.5
SCL: J2.4 J3.4 J4.4 R5.1 U2.8
SCL1: J1.4 J6.4 J7.4 R6.1 U1.8
SCL2: J9.4 J10.4 J11.4 R10.1 U3.8
SCL3: J13.4 J14.4 J15.4 R14.1 U4.8
SCL4: J17.4 J18.4 J19.4 R18.1 U5.8
SCL5: J21.4 J22.4 J23.4 R22.1 U6.8
SCL6: J25.4 J26.4 J27.4 R26.1 U7.8
SCL7: J29.4 J30.4 J31.4 R30.1 U8.8
SCL8: J33.4 J34.4 J35.4 R34.1 U9.8
SDA: J2.3 J3.3 J4.3 R4.1 U2.7
SDA1: J1.3 J6.3 J7.3 R2.1 U1.7
SDA2: J9.3 J10.3 J11.3 R9.1 U3.7
SDA3: J13.3 J14.3 J15.3 R13.1 U4.7
SDA4: J17.3 J18.3 J19.3 R17.1 U5.7
SDA5: J21.3 J22.3 J23.3 R21.1 U6.7
SDA6: J25.3 J26.3 J27.3 R25.1 U7.7
SDA7: J29.3 J30.3 J31.3 R29.1 U8.7
SDA8: J33.3 J34.3 J35.3 R33.1 U9.7

## Tracks (layer width: path | path; a pad name or v marks a point on that pad's centre or on a via)
3.3V  (via drill 0.3)
  Top 0.152: J4.2 26.28,19.06 25.91,19.43 25.91,20.07 25.57,20.41 C1.1 23.2,20.41 22.99,20.19 22.99,18.92 22.62,18.56 U2.4 U2.3 20.1,18 20.41,17.69 C4.1 20.41,16.34 19.81,15.75 17.02,15.75 | J2.2 12.71,20.06 13.21,19.56 v13.21,15.75 17.02,15.75 | R3.2 10.88,10.25 v10.67,10.03 | J3.2 17.02,15.75
  Bottom 0.152: 10.16,15.75 JP9.2 10.16,10.29 10.41,10.03 v10.67,10.03 | 10.16,15.75 10.16,16.26 9.4,17.02 9.4,24.89 10.29,25.78 19.18,25.78 19.56,25.4 I2C.2 | v13.21,15.75 10.16,15.75
3.3V1  (via drill 0.3)
  Top 0.152: J7.2 52.19,19.06 51.82,19.43 51.82,20.07 51.47,20.41 C2.1 49.11,20.41 48.89,20.19 48.89,18.92 48.53,18.56 U1.4 U1.3 46,18 46.32,17.69 C3.1 46.32,16.34 45.72,15.75 42.93,15.75 | J1.2 38.62,20.06 39.12,19.56 v39.12,15.75 42.93,15.75 | R8.2 36.79,10.25 v36.58,10.03 | J6.2 42.93,15.75
  Bottom 0.152: 36.07,15.75 JP14.2 36.07,10.29 36.32,10.03 v36.58,10.03 | 36.07,15.75 36.07,16.26 35.31,17.02 35.31,24.89 36.2,25.78 45.08,25.78 45.47,25.4 I2C1.2 | v39.12,15.75 36.07,15.75
3.3V2  (via drill 0.3)
  Top 0.152: J11.2 78.1,19.06 77.72,19.43 77.72,20.07 77.38,20.41 C5.1 75.02,20.41 74.8,20.19 74.8,18.92 74.44,18.56 U3.4 U3.3 71.91,18 72.22,17.69 C6.1 72.22,16.34 71.63,15.75 68.83,15.75 | J9.2 64.52,20.06 65.02,19.56 v65.02,15.75 68.83,15.75 | R12.2 62.7,10.25 v62.48,10.03 | J10.2 68.83,15.75
  Bottom 0.152: 61.98,15.75 JP21.2 61.98,10.29 62.23,10.03 v62.48,10.03 | 61.98,15.75 61.98,16.26 61.21,17.02 61.21,24.89 62.1,25.78 70.99,25.78 71.37,25.4 I2C2.2 | v65.02,15.75 61.98,15.75
3.3V3  (via drill 0.3)
  Top 0.152: J15.2 26.28,44.97 25.91,45.34 25.91,45.97 25.57,46.32 C7.1 23.2,46.32 22.99,46.1 22.99,44.83 22.62,44.47 U4.4 U4.3 20.1,43.91 20.41,43.6 C8.1 20.41,42.25 19.81,41.66 17.02,41.66 | J13.2 12.71,45.97 13.21,45.47 v13.21,41.66 17.02,41.66 | R16.2 10.88,36.16 v10.67,35.94 | J14.2 17.02,41.66
  Bottom 0.152: 10.16,41.66 JP28.2 10.16,36.2 10.41,35.94 v10.67,35.94 | 10.16,41.66 10.16,42.16 9.4,42.93 9.4,50.8 10.29,51.69 19.18,51.69 19.56,51.31 I2C3.2 | v13.21,41.66 10.16,41.66
3.3V4  (via drill 0.3)
  Top 0.152: J19.2 52.19,44.97 51.82,45.34 51.82,45.97 51.47,46.32 C9.1 49.11,46.32 48.89,46.1 48.89,44.83 48.53,44.47 U5.4 U5.3 46,43.91 46.32,43.6 C10.1 46.32,42.25 45.72,41.66 42.93,41.66 | J17.2 38.62,45.97 39.12,45.47 v39.12,41.66 42.93,41.66 | R20.2 36.79,36.16 v36.58,35.94 | J18.2 42.93,41.66
  Bottom 0.152: 36.07,41.66 JP35.2 36.07,36.2 36.32,35.94 v36.58,35.94 | 36.07,41.66 36.07,42.16 35.31,42.93 35.31,50.8 36.2,51.69 45.08,51.69 45.47,51.31 I2C4.2 | v39.12,41.66 36.07,41.66
3.3V5  (via drill 0.3)
  Top 0.152: J23.2 78.1,44.97 77.72,45.34 77.72,45.97 77.38,46.32 C11.1 75.02,46.32 74.8,46.1 74.8,44.83 74.44,44.47 U6.4 U6.3 71.91,43.91 72.22,43.6 C12.1 72.22,42.25 71.63,41.66 68.83,41.66 | J21.2 64.52,45.97 65.02,45.47 v65.02,41.66 68.83,41.66 | R24.2 62.7,36.16 v62.48,35.94 | J22.2 68.83,41.66
  Bottom 0.152: 61.98,41.66 JP42.2 61.98,36.2 62.23,35.94 v62.48,35.94 | 61.98,41.66 61.98,42.16 61.21,42.93 61.21,50.8 62.1,51.69 70.99,51.69 71.37,51.31 I2C5.2 | v65.02,41.66 61.98,41.66
3.3V6  (via drill 0.3)
  Top 0.152: J27.2 26.28,70.87 25.91,71.25 25.91,71.88 25.57,72.22 C13.1 23.2,72.22 22.99,72.01 22.99,70.74 22.62,70.37 U7.4 U7.3 20.1,69.82 20.41,69.51 C14.1 20.41,68.16 19.81,67.56 17.02,67.56 | J25.2 12.71,71.87 13.21,71.37 v13.21,67.56 17.02,67.56 | R28.2 10.88,62.06 v10.67,61.85 | J26.2 17.02,67.56
  Bottom 0.152: 10.16,67.56 JP49.2 10.16,62.1 10.41,61.85 v10.67,61.85 | 10.16,67.56 10.16,68.07 9.4,68.83 9.4,76.71 10.29,77.6 19.18,77.6 19.56,77.22 I2C6.2 | v13.21,67.56 10.16,67.56
3.3V7  (via drill 0.3)
  Top 0.152: J31.2 52.19,70.87 51.82,71.25 51.82,71.88 51.47,72.22 C15.1 49.11,72.22 48.89,72.01 48.89,70.74 48.53,70.37 U8.4 U8.3 46,69.82 46.32,69.51 C16.1 46.32,68.16 45.72,67.56 42.93,67.56 | J29.2 38.62,71.87 39.12,71.37 v39.12,67.56 42.93,67.56 | R32.2 36.79,62.06 v36.58,61.85 | J30.2 42.93,67.56
  Bottom 0.152: 36.07,67.56 JP56.2 36.07,62.1 36.32,61.85 v36.58,61.85 | 36.07,67.56 36.07,68.07 35.31,68.83 35.31,76.71 36.2,77.6 45.08,77.6 45.47,77.22 I2C7.2 | v39.12,67.56 36.07,67.56
3.3V8  (via drill 0.3)
  Top 0.152: J35.2 78.1,70.87 77.72,71.25 77.72,71.88 77.38,72.22 C17.1 75.02,72.22 74.8,72.01 74.8,70.74 74.44,70.37 U9.4 U9.3 71.91,69.82 72.22,69.51 C18.1 72.22,68.16 71.63,67.56 68.83,67.56 | J33.2 64.52,71.87 65.02,71.37 v65.02,67.56 68.83,67.56 | R36.2 62.7,62.06 v62.48,61.85 | J34.2 68.83,67.56
  Bottom 0.152: 61.98,67.56 JP63.2 61.98,62.1 62.23,61.85 v62.48,61.85 | 61.98,67.56 61.98,68.07 61.21,68.83 61.21,76.71 62.1,77.6 70.99,77.6 71.37,77.22 I2C8.2 | v65.02,67.56 61.98,67.56
!INT  (via drill 0.3)
  Top 0.152: R1.1 15.41,18.71 15.75,19.05 v15.75,19.56 19.05,19.56 19.3,19.81 19.94,19.81 20.1,19.97 U2.6
  Bottom 0.152: J5.1 24.64,13.21 23.37,14.48 17.02,14.48 15.75,15.75 v15.75,19.56
!INT1  (via drill 0.3)
  Top 0.152: R7.1 41.31,18.71 41.66,19.05 v41.66,19.56 44.96,19.56 45.21,19.81 45.85,19.81 46,19.97 U1.6
  Bottom 0.152: J8.1 50.55,13.21 49.28,14.48 42.93,14.48 41.66,15.75 v41.66,19.56
!INT2  (via drill 0.3)
  Top 0.152: R11.1 67.22,18.71 67.56,19.05 v67.56,19.56 70.87,19.56 71.12,19.81 71.76,19.81 71.91,19.97 U3.6
  Bottom 0.152: J12.1 76.45,13.21 75.18,14.48 68.83,14.48 67.56,15.75 v67.56,19.56
!INT3  (via drill 0.3)
  Top 0.152: R15.1 15.41,44.62 15.75,44.96 v15.75,45.47 19.05,45.47 19.3,45.72 19.94,45.72 20.1,45.88 U4.6
  Bottom 0.152: J16.1 24.64,39.12 23.37,40.39 17.02,40.39 15.75,41.66 v15.75,45.47
!INT4  (via drill 0.3)
  Top 0.152: R19.1 41.31,44.62 41.66,44.96 v41.66,45.47 44.96,45.47 45.21,45.72 45.85,45.72 46,45.88 U5.6
  Bottom 0.152: J20.1 50.55,39.12 49.28,40.39 42.93,40.39 41.66,41.66 v41.66,45.47
!INT5  (via drill 0.3)
  Top 0.152: R23.1 67.22,44.62 67.56,44.96 v67.56,45.47 70.87,45.47 71.12,45.72 71.76,45.72 71.91,45.88 U6.6
  Bottom 0.152: J24.1 76.45,39.12 75.18,40.39 68.83,40.39 67.56,41.66 v67.56,45.47
!INT6  (via drill 0.3)
  Top 0.152: R27.1 15.41,70.52 15.75,70.87 v15.75,71.37 19.05,71.37 19.3,71.63 19.94,71.63 20.1,71.79 U7.6
  Bottom 0.152: J28.1 24.64,65.02 23.37,66.29 17.02,66.29 15.75,67.56 v15.75,71.37
!INT7  (via drill 0.3)
  Top 0.152: R31.1 41.31,70.52 41.66,70.87 v41.66,71.37 44.96,71.37 45.21,71.63 45.85,71.63 46,71.79 U8.6
  Bottom 0.152: J32.1 50.55,65.02 49.28,66.29 42.93,66.29 41.66,67.56 v41.66,71.37
!INT8  (via drill 0.3)
  Top 0.152: R35.1 67.22,70.52 67.56,70.87 v67.56,71.37 70.87,71.37 71.12,71.63 71.76,71.63 71.91,71.79 U9.6
  Bottom 0.152: J36.1 76.45,65.02 75.18,66.29 68.83,66.29 67.56,67.56 v67.56,71.37
GND  (via drill 0.3)
  Top 0.152: J2.1 12.8,21.06 13.21,21.46 15.11,21.46 v15.75,20.83
  other vias: 24.64,17.02 18.29,10.67 25.91,23.37 17.02,17.02
  pour Bottom (isolate 0.305): 6.86,6.86 6.86,32.26 32.26,32.26 32.26,6.86
  pour Top (isolate 0.305): 6.86,6.86 6.86,32.26 32.26,32.26 32.26,6.86
GND1  (via drill 0.3)
  Top 0.152: J1.1 38.71,21.06 39.12,21.46 41.02,21.46 v41.66,20.83
  other vias: 50.55,17.02 44.2,10.67 51.82,23.37 42.93,17.02
  pour Bottom (isolate 0.305): 32.77,6.86 32.77,32.26 58.17,32.26 58.17,6.86
  pour Top (isolate 0.305): 32.77,6.86 32.77,32.26 58.17,32.26 58.17,6.86
GND2  (via drill 0.3)
  Top 0.152: J9.1 64.62,21.06 65.02,21.46 66.93,21.46 v67.56,20.83
  other vias: 76.45,17.02 70.1,10.67 77.72,23.37 68.83,17.02
  pour Bottom (isolate 0.305): 58.67,6.86 58.67,32.26 84.07,32.26 84.07,6.86
  pour Top (isolate 0.305): 58.67,6.86 58.67,32.26 84.07,32.26 84.07,6.86
GND3  (via drill 0.3)
  Top 0.152: J13.1 12.8,46.97 13.21,47.37 15.11,47.37 v15.75,46.74
  other vias: 24.64,42.93 18.29,36.58 25.91,49.28 17.02,42.93
  pour Bottom (isolate 0.305): 6.86,32.77 6.86,58.17 32.26,58.17 32.26,32.77
  pour Top (isolate 0.305): 6.86,32.77 6.86,58.17 32.26,58.17 32.26,32.77
GND4  (via drill 0.3)
  Top 0.152: J17.1 38.71,46.97 39.12,47.37 41.02,47.37 v41.66,46.74
  other vias: 50.55,42.93 44.2,36.58 51.82,49.28 42.93,42.93
  pour Bottom (isolate 0.305): 32.77,32.77 32.77,58.17 58.17,58.17 58.17,32.77
  pour Top (isolate 0.305): 32.77,32.77 32.77,58.17 58.17,58.17 58.17,32.77
GND5  (via drill 0.3)
  Top 0.152: J21.1 64.62,46.97 65.02,47.37 66.93,47.37 v67.56,46.74
  other vias: 76.45,42.93 70.1,36.58 77.72,49.28 68.83,42.93
  pour Bottom (isolate 0.305): 58.67,32.77 58.67,58.17 84.07,58.17 84.07,32.77
  pour Top (isolate 0.305): 58.67,32.77 58.67,58.17 84.07,58.17 84.07,32.77
GND6  (via drill 0.3)
  Top 0.152: J25.1 12.8,72.87 13.21,73.28 15.11,73.28 v15.75,72.64
  other vias: 24.64,68.83 18.29,62.48 25.91,75.18 17.02,68.83
  pour Bottom (isolate 0.305): 6.86,58.67 6.86,84.07 32.26,84.07 32.26,58.67
  pour Top (isolate 0.305): 6.86,58.67 6.86,84.07 32.26,84.07 32.26,58.67
GND7  (via drill 0.3)
  Top 0.152: J29.1 38.71,72.87 39.12,73.28 41.02,73.28 v41.66,72.64
  other vias: 50.55,68.83 44.2,62.48 51.82,75.18 42.93,68.83
  pour Bottom (isolate 0.305): 32.77,58.67 32.77,84.07 58.17,84.07 58.17,58.67
  pour Top (isolate 0.305): 32.77,58.67 32.77,84.07 58.17,84.07 58.17,58.67
GND8  (via drill 0.3)
  Top 0.152: J33.1 64.62,72.87 65.02,73.28 66.93,73.28 v67.56,72.64
  other vias: 76.45,68.83 70.1,62.48 77.72,75.18 68.83,68.83
  pour Bottom (isolate 0.305): 58.67,58.67 58.67,84.07 84.07,84.07 84.07,58.67
  pour Top (isolate 0.305): 58.67,58.67 58.67,84.07 84.07,84.07 84.07,58.67
N$1  (via drill 0.3)
  Top 0.152: R5.2 v22.95,24.93
  Bottom 0.152: I2C.1 21.38,23.37 v22.95,24.93
N$2  (via drill 0.3)
  Top 0.152: R4.2 v16.17,24.55
  Bottom 0.152: I2C.3 18.54,25.02 18.29,25.27 16.38,25.27 16.17,25.06 v16.17,24.55
N$3
  Top 0.152: D1.A 9.16,11.58 R3.1
N$4  (via drill 0.3)
  Top 0.152: R1.2 13.63,20.41 v13.46,20.57
  Bottom 0.152: 13.72,20.32 v13.46,20.57 14.1,19.94 14.1,14.35 12.95,13.21 JP9.1
N$5  (via drill 0.3)
  Top 0.152: R6.2 v48.86,24.93
  Bottom 0.152: I2C1.1 47.29,23.37 v48.86,24.93
N$6
  Top 0.152: U2.5 21.17,19.9 20.57,19.3 19.43,19.3 19.02,18.89 U2.2
N$7  (via drill 0.3)
  Top 0.152: R2.2 v42.08,24.55
  Bottom 0.152: I2C1.3 44.45,25.02 44.2,25.27 42.29,25.27 42.08,25.06 v42.08,24.55
N$8  (via drill 0.3)
  Top 0.152: R7.2 39.54,20.41 v39.37,20.57
  Bottom 0.152: 39.62,20.32 v39.37,20.57 40,19.94 40,14.35 38.86,13.21 JP14.1
N$9
  Top 0.152: D2.A 35.06,11.58 R8.1
N$10
  Top 0.152: U1.5 47.08,19.9 46.48,19.3 45.34,19.3 44.93,18.89 U1.2
N$11  (via drill 0.3)
  Top 0.152: R10.2 v74.76,24.93
  Bottom 0.152: I2C2.1 73.2,23.37 v74.76,24.93
N$12  (via drill 0.3)
  Top 0.152: R9.2 v67.98,24.55
  Bottom 0.152: I2C2.3 70.36,25.02 70.1,25.27 68.2,25.27 67.98,25.06 v67.98,24.55
N$13  (via drill 0.3)
  Top 0.152: R11.2 65.44,20.41 v65.28,20.57
  Bottom 0.152: 65.53,20.32 v65.28,20.57 65.91,19.94 65.91,14.35 64.77,13.21 JP21.1
N$14
  Top 0.152: D3.A 60.97,11.58 R12.1
N$15
  Top 0.152: U3.5 72.99,19.9 72.39,19.3 71.25,19.3 70.84,18.89 U3.2
N$16  (via drill 0.3)
  Top 0.152: R14.2 v22.95,50.84
  Bottom 0.152: I2C3.1 21.38,49.28 v22.95,50.84
N$17  (via drill 0.3)
  Top 0.152: R13.2 v16.17,50.46
  Bottom 0.152: I2C3.3 18.54,50.93 18.29,51.18 16.38,51.18 16.17,50.97 v16.17,50.46
N$18  (via drill 0.3)
  Top 0.152: R15.2 13.63,46.32 v13.46,46.48
  Bottom 0.152: 13.72,46.23 v13.46,46.48 14.1,45.85 14.1,40.26 12.95,39.12 JP28.1
N$19
  Top 0.152: D4.A 9.16,37.49 R16.1
N$20
  Top 0.152: U4.5 21.17,45.81 20.57,45.21 19.43,45.21 19.02,44.8 U4.2
N$21  (via drill 0.3)
  Top 0.152: R18.2 v48.86,50.84
  Bottom 0.152: I2C4.1 47.29,49.28 v48.86,50.84
N$22  (via drill 0.3)
  Top 0.152: R17.2 v42.08,50.46
  Bottom 0.152: I2C4.3 44.45,50.93 44.2,51.18 42.29,51.18 42.08,50.97 v42.08,50.46
N$23  (via drill 0.3)
  Top 0.152: R19.2 39.54,46.32 v39.37,46.48
  Bottom 0.152: 39.62,46.23 v39.37,46.48 40,45.85 40,40.26 38.86,39.12 JP35.1
N$24
  Top 0.152: D5.A 35.06,37.49 R20.1
N$25
  Top 0.152: U5.5 47.08,45.81 46.48,45.21 45.34,45.21 44.93,44.8 U5.2
N$26  (via drill 0.3)
  Top 0.152: R22.2 v74.76,50.84
  Bottom 0.152: I2C5.1 73.2,49.28 v74.76,50.84
N$27  (via drill 0.3)
  Top 0.152: R21.2 v67.98,50.46
  Bottom 0.152: I2C5.3 70.36,50.93 70.1,51.18 68.2,51.18 67.98,50.97 v67.98,50.46
N$28  (via drill 0.3)
  Top 0.152: R23.2 65.44,46.32 v65.28,46.48
  Bottom 0.152: 65.53,46.23 v65.28,46.48 65.91,45.85 65.91,40.26 64.77,39.12 JP42.1
N$29
  Top 0.152: D6.A 60.97,37.49 R24.1
N$30
  Top 0.152: U6.5 72.99,45.81 72.39,45.21 71.25,45.21 70.84,44.8 U6.2
N$31  (via drill 0.3)
  Top 0.152: R26.2 v22.95,76.75
  Bottom 0.152: I2C6.1 21.38,75.18 v22.95,76.75
N$32  (via drill 0.3)
  Top 0.152: R25.2 v16.17,76.37
  Bottom 0.152: I2C6.3 18.54,76.84 18.29,77.09 16.38,77.09 16.17,76.87 v16.17,76.37
N$33  (via drill 0.3)
  Top 0.152: R27.2 13.63,72.22 v13.46,72.39
  Bottom 0.152: 13.72,72.14 v13.46,72.39 14.1,71.76 14.1,66.17 12.95,65.02 JP49.1
N$34
  Top 0.152: D7.A 9.16,63.4 R28.1
N$35
  Top 0.152: U7.5 21.17,71.72 20.57,71.12 19.43,71.12 19.02,70.71 U7.2
N$36  (via drill 0.3)
  Top 0.152: R30.2 v48.86,76.75
  Bottom 0.152: I2C7.1 47.29,75.18 v48.86,76.75
N$37  (via drill 0.3)
  Top 0.152: R29.2 v42.08,76.37
  Bottom 0.152: I2C7.3 44.45,76.84 44.2,77.09 42.29,77.09 42.08,76.87 v42.08,76.37
N$38  (via drill 0.3)
  Top 0.152: R31.2 39.54,72.22 v39.37,72.39
  Bottom 0.152: 39.62,72.14 v39.37,72.39 40,71.76 40,66.17 38.86,65.02 JP56.1
N$39
  Top 0.152: D8.A 35.06,63.4 R32.1
N$40
  Top 0.152: U8.5 47.08,71.72 46.48,71.12 45.34,71.12 44.93,70.71 U8.2
N$41  (via drill 0.3)
  Top 0.152: R34.2 v74.76,76.75
  Bottom 0.152: I2C8.1 73.2,75.18 v74.76,76.75
N$42  (via drill 0.3)
  Top 0.152: R33.2 v67.98,76.37
  Bottom 0.152: I2C8.3 70.36,76.84 70.1,77.09 68.2,77.09 67.98,76.87 v67.98,76.37
N$43  (via drill 0.3)
  Top 0.152: R35.2 65.44,72.22 v65.28,72.39
  Bottom 0.152: 65.53,72.14 v65.28,72.39 65.91,71.76 65.91,66.17 64.77,65.02 JP63.1
N$44
  Top 0.152: D9.A 60.97,63.4 R36.1
N$45
  Top 0.152: U9.5 72.99,71.72 72.39,71.12 71.25,71.12 70.84,70.71 U9.2
SCL
  Top 0.152: 21.21,22.1 25.53,22.1 26.57,21.06 J4.4 28.6,21.06 29.21,20.45 29.21,16.51 27.18,14.48 23.37,14.48 22.1,13.21 J3.4 | 21.21,22.1 20.32,22.1 | 20.32,22.1 16.13,22.1 | 16.13,22.1 10.67,22.1 9.4,20.83 9.4,18.8 10.14,18.06 J2.4 | 20.36,22.06 20.32,22.1 | R5.1 21.25,22.14 21.21,22.1 | U2.8 16.91,20.56 16.13,21.34 16.13,22.1
SCL1
  Top 0.152: 47.12,22.1 51.43,22.1 52.47,21.06 J7.4 54.51,21.06 55.12,20.45 55.12,16.51 53.09,14.48 49.28,14.48 48.01,13.21 J6.4 | 47.12,22.1 46.23,22.1 | 46.23,22.1 42.04,22.1 | 42.04,22.1 36.58,22.1 35.31,20.83 35.31,18.8 36.04,18.06 J1.4 | 46.27,22.06 46.23,22.1 | R6.1 47.16,22.14 47.12,22.1 | U1.8 42.81,20.56 42.04,21.34 42.04,22.1
SCL2
  Top 0.152: 73.03,22.1 77.34,22.1 78.38,21.06 J11.4 80.42,21.06 81.03,20.45 81.03,16.51 78.99,14.48 75.18,14.48 73.91,13.21 J10.4 | 73.03,22.1 72.14,22.1 | 72.14,22.1 67.95,22.1 | 67.95,22.1 62.48,22.1 61.21,20.83 61.21,18.8 61.95,18.06 J9.4 | 72.17,22.06 72.14,22.1 | R10.1 73.06,22.14 73.03,22.1 | U3.8 68.72,20.56 67.95,21.34 67.95,22.1
SCL3
  Top 0.152: 21.21,48.01 25.53,48.01 26.57,46.97 J15.4 28.6,46.97 29.21,46.35 29.21,42.42 27.18,40.39 23.37,40.39 22.1,39.12 J14.4 | 21.21,48.01 20.32,48.01 | 20.32,48.01 16.13,48.01 | 16.13,48.01 10.67,48.01 9.4,46.74 9.4,44.7 10.14,43.97 J13.4 | 20.36,47.97 20.32,48.01 | R14.1 21.25,48.04 21.21,48.01 | U4.8 16.91,46.47 16.13,47.24 16.13,48.01
SCL4
  Top 0.152: 47.12,48.01 51.43,48.01 52.47,46.97 J19.4 54.51,46.97 55.12,46.35 55.12,42.42 53.09,40.39 49.28,40.39 48.01,39.12 J18.4 | 47.12,48.01 46.23,48.01 | 46.23,48.01 42.04,48.01 | 42.04,48.01 36.58,48.01 35.31,46.74 35.31,44.7 36.04,43.97 J17.4 | 46.27,47.97 46.23,48.01 | R18.1 47.16,48.04 47.12,48.01 | U5.8 42.81,46.47 42.04,47.24 42.04,48.01
SCL5
  Top 0.152: 73.03,48.01 77.34,48.01 78.38,46.97 J23.4 80.42,46.97 81.03,46.35 81.03,42.42 78.99,40.39 75.18,40.39 73.91,39.12 J22.4 | 73.03,48.01 72.14,48.01 | 72.14,48.01 67.95,48.01 | 67.95,48.01 62.48,48.01 61.21,46.74 61.21,44.7 61.95,43.97 J21.4 | 72.17,47.97 72.14,48.01 | R22.1 73.06,48.04 73.03,48.01 | U6.8 68.72,46.47 67.95,47.24 67.95,48.01
SCL6
  Top 0.152: 21.21,73.91 25.53,73.91 26.57,72.87 J27.4 28.6,72.87 29.21,72.26 29.21,68.33 27.18,66.29 23.37,66.29 22.1,65.02 J26.4 | 21.21,73.91 20.32,73.91 | 20.32,73.91 16.13,73.91 | 16.13,73.91 10.67,73.91 9.4,72.64 9.4,70.61 10.14,69.87 J25.4 | 20.36,73.88 20.32,73.91 | R26.1 21.25,73.95 21.21,73.91 | U7.8 16.91,72.37 16.13,73.15 16.13,73.91
SCL7
  Top 0.152: 47.12,73.91 51.43,73.91 52.47,72.87 J31.4 54.51,72.87 55.12,72.26 55.12,68.33 53.09,66.29 49.28,66.29 48.01,65.02 J30.4 | 47.12,73.91 46.23,73.91 | 46.23,73.91 42.04,73.91 | 42.04,73.91 36.58,73.91 35.31,72.64 35.31,70.61 36.04,69.87 J29.4 | 46.27,73.88 46.23,73.91 | R30.1 47.16,73.95 47.12,73.91 | U8.8 42.81,72.37 42.04,73.15 42.04,73.91
SCL8
  Top 0.152: 73.03,73.91 77.34,73.91 78.38,72.87 J35.4 80.42,72.87 81.03,72.26 81.03,68.33 78.99,66.29 75.18,66.29 73.91,65.02 J34.4 | 73.03,73.91 72.14,73.91 | 72.14,73.91 67.95,73.91 | 67.95,73.91 62.48,73.91 61.21,72.64 61.21,70.61 61.95,69.87 J33.4 | 72.17,73.88 72.14,73.91 | R34.1 73.06,73.95 73.03,73.91 | U9.8 68.72,72.37 67.95,73.15 67.95,73.91
SDA  (via drill 0.3)
  Top 0.152: v25.15,21.46 26.55,20.06 J4.3 28.07,20.06 28.45,19.68 28.45,17.02 27.18,15.75 20.83,15.75 19.56,14.48 J3.3 | J2.3 10.79,19.06 v10.29,19.56 | R4.1 17.87,24.3 17.53,24.64 v17.02,24.64 | v17.02,21.46 18.54,21.46 19.02,20.98 U2.7
  Bottom 0.152: v10.29,19.56 10.29,20.45 11.3,21.46 v17.02,21.46 | v25.15,21.46 v17.02,21.46 | v17.02,24.64 v17.02,21.46
SDA1  (via drill 0.3)
  Top 0.152: v51.05,21.46 52.46,20.06 J7.3 53.98,20.06 54.36,19.68 54.36,17.02 53.09,15.75 46.74,15.75 45.47,14.48 J6.3 | J1.3 36.7,19.06 v36.2,19.56 | R2.1 43.78,24.3 43.43,24.64 v42.93,24.64 | v42.93,21.46 44.45,21.46 44.93,20.98 U1.7
  Bottom 0.152: v36.2,19.56 36.2,20.45 37.21,21.46 v42.93,21.46 | v51.05,21.46 v42.93,21.46 | v42.93,24.64 v42.93,21.46
SDA2  (via drill 0.3)
  Top 0.152: v76.96,21.46 78.37,20.06 J11.3 79.89,20.06 80.26,19.68 80.26,17.02 78.99,15.75 72.64,15.75 71.37,14.48 J10.3 | J9.3 62.6,19.06 v62.1,19.56 | R9.1 69.68,24.3 69.34,24.64 v68.83,24.64 | v68.83,21.46 70.36,21.46 70.84,20.98 U3.7
  Bottom 0.152: v62.1,19.56 62.1,20.45 63.12,21.46 v68.83,21.46 | v76.96,21.46 v68.83,21.46 | v68.83,24.64 v68.83,21.46
SDA3  (via drill 0.3)
  Top 0.152: v25.15,47.37 26.55,45.97 J15.3 28.07,45.97 28.45,45.59 28.45,42.93 27.18,41.66 20.83,41.66 19.56,40.39 J14.3 | J13.3 10.79,44.97 v10.29,45.47 | R13.1 17.87,50.2 17.53,50.55 v17.02,50.55 | v17.02,47.37 18.54,47.37 19.02,46.89 U4.7
  Bottom 0.152: v10.29,45.47 10.29,46.35 11.3,47.37 v17.02,47.37 | v25.15,47.37 v17.02,47.37 | v17.02,50.55 v17.02,47.37
SDA4  (via drill 0.3)
  Top 0.152: v51.05,47.37 52.46,45.97 J19.3 53.98,45.97 54.36,45.59 54.36,42.93 53.09,41.66 46.74,41.66 45.47,40.39 J18.3 | J17.3 36.7,44.97 v36.2,45.47 | R17.1 43.78,50.2 43.43,50.55 v42.93,50.55 | v42.93,47.37 44.45,47.37 44.93,46.89 U5.7
  Bottom 0.152: v36.2,45.47 36.2,46.35 37.21,47.37 v42.93,47.37 | v51.05,47.37 v42.93,47.37 | v42.93,50.55 v42.93,47.37
SDA5  (via drill 0.3)
  Top 0.152: v76.96,47.37 78.37,45.97 J23.3 79.89,45.97 80.26,45.59 80.26,42.93 78.99,41.66 72.64,41.66 71.37,40.39 J22.3 | J21.3 62.6,44.97 v62.1,45.47 | R21.1 69.68,50.2 69.34,50.55 v68.83,50.55 | v68.83,47.37 70.36,47.37 70.84,46.89 U6.7
  Bottom 0.152: v62.1,45.47 62.1,46.35 63.12,47.37 v68.83,47.37 | v76.96,47.37 v68.83,47.37 | v68.83,50.55 v68.83,47.37
SDA6  (via drill 0.3)
  Top 0.152: v25.15,73.28 26.55,71.87 J27.3 28.07,71.87 28.45,71.5 28.45,68.83 27.18,67.56 20.83,67.56 19.56,66.29 J26.3 | J25.3 10.79,70.87 v10.29,71.37 | R25.1 17.87,76.11 17.53,76.45 v17.02,76.45 | v17.02,73.28 18.54,73.28 19.02,72.8 U7.7
  Bottom 0.152: v10.29,71.37 10.29,72.26 11.3,73.28 v17.02,73.28 | v25.15,73.28 v17.02,73.28 | v17.02,76.45 v17.02,73.28
SDA7  (via drill 0.3)
  Top 0.152: v51.05,73.28 52.46,71.87 J31.3 53.98,71.87 54.36,71.5 54.36,68.83 53.09,67.56 46.74,67.56 45.47,66.29 J30.3 | J29.3 36.7,70.87 v36.2,71.37 | R29.1 43.78,76.11 43.43,76.45 v42.93,76.45 | v42.93,73.28 44.45,73.28 44.93,72.8 U8.7
  Bottom 0.152: v36.2,71.37 36.2,72.26 37.21,73.28 v42.93,73.28 | v51.05,73.28 v42.93,73.28 | v42.93,76.45 v42.93,73.28
SDA8  (via drill 0.3)
  Top 0.152: v76.96,73.28 78.37,71.87 J35.3 79.89,71.87 80.26,71.5 80.26,68.83 78.99,67.56 72.64,67.56 71.37,66.29 J34.3 | J33.3 62.6,70.87 v62.1,71.37 | R33.1 69.68,76.11 69.34,76.45 v68.83,76.45 | v68.83,73.28 70.36,73.28 70.84,72.8 U9.7
  Bottom 0.152: v62.1,71.37 62.1,72.26 63.12,73.28 v68.83,73.28 | v76.96,73.28 v68.83,73.28 | v68.83,76.45 v68.83,73.28

## Text on the board
Bottom: X01 | X01 | X01 | X01 | X01 | X01 | X01 | X01 | X01
Milling: v-score | v-score | v-score | v-score | v-score | v-score | v-score | v-score